# EAGLE board module_JDY08 (EAGLE 9.0.1)
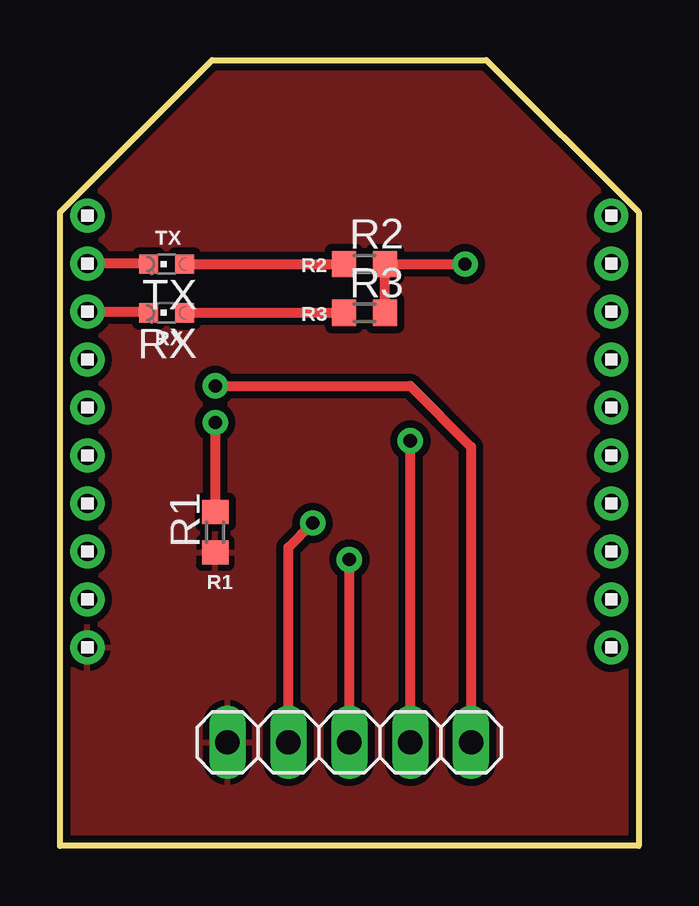
[diagram p0: board, top side]
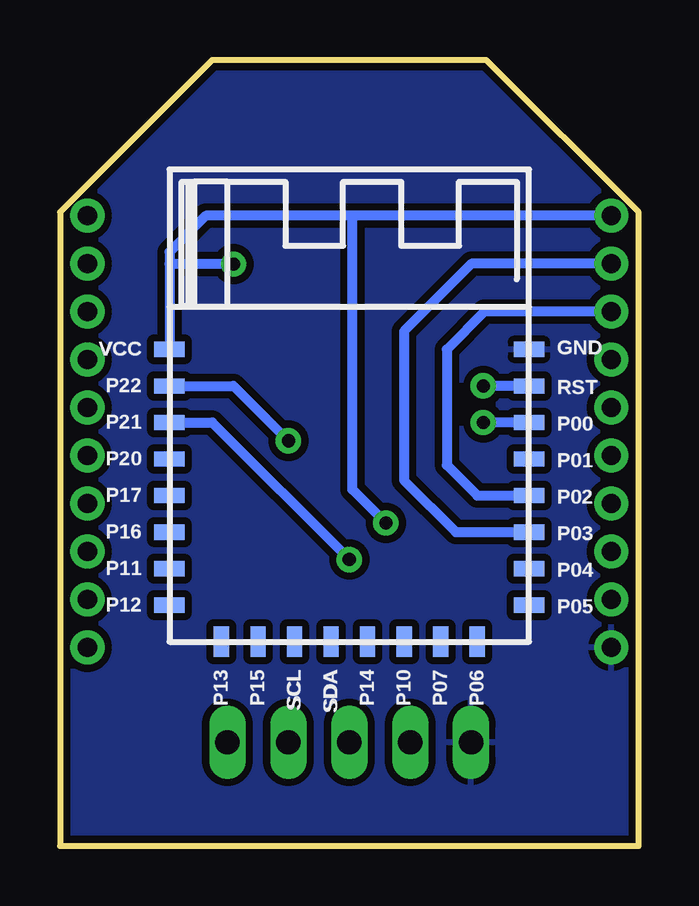
[diagram p1: board, bottom side, seen from below]

Size 24.13 x 32.77 mm. Coordinates in mm from the lower left corner, seen from the top.
Outline: 0,0 0,26.42 6.35,32.77 17.78,32.77 24.13,26.42 24.13,0 0,0
Copper layers (1*16): Top 0.035mm / dielectric 1.5mm / Bottom 0.035mm
Design rules "SparkFun-2-layer-STANDARD": minimum track width 10mil, minimum drill 20mil, track to track 10mil, track to pad 8mil, pad to pad 8mil, via to via 10mil, smd to smd 8mil, copper to edge 8mil, drill to drill 8mil, minimum pad ring 10mil, minimum via ring 10mil, stop-mask expansion 4mil, vias tented up to drill 25mil, thermal gap 10mil

## Footprints (pad centres in the part's own frame; a part is rotated, then mirrored left to right if it is on the bottom)
SMD0,65-1,27 = smd 0.635 x 1.27: 1 0,0
1X05 = drill 1.016 long: 1 -5.08,0; 2 -2.54,0; 3 0,0; 4 2.54,0; 5 5.08,0
1X10 = drill 0.8 pad 1.422: 1 -9,0; 2 -7,0; 3 -5,0; 4 -3,0; 5 -1,0; 6 1,0; 7 3,0; 8 5,0; 9 7,0; 10 9,0
R0603 = smd 1 x 1.1: 1 -0.85,0; 2 0.85,0
CHIPLED_0603 = smd 0.8 x 0.8: A 0,-0.75; C 0,0.75

## Placement (x,y rotation side)
GND  [SMD0,65-1,27]  4.57,20.7 90 bottom
JP1  [1X05]  12.06,4.32 0 top
LEFT1  1X10  [1X10]  1.14,17.27 270 top
P00  [SMD0,65-1,27]  4.57,17.65 90 bottom
P01  [SMD0,65-1,27]  4.57,16.13 90 bottom
P02  [SMD0,65-1,27]  4.57,14.6 90 bottom
P03  [SMD0,65-1,27]  4.57,13.08 90 bottom
P04  [SMD0,65-1,27]  4.57,11.56 90 bottom
P05  [SMD0,65-1,27]  4.57,10.03 90 bottom
P06  [SMD0,65-1,27]  6.73,8.51 0 bottom
P07  [SMD0,65-1,27]  8.25,8.51 0 bottom
P10  [SMD0,65-1,27]  9.78,8.51 0 bottom
P11  [SMD0,65-1,27]  19.56,11.56 270 bottom
P12  [SMD0,65-1,27]  19.56,10.03 270 bottom
P13  [SMD0,65-1,27]  17.4,8.51 0 bottom
P14  [SMD0,65-1,27]  11.3,8.51 180 bottom
P15  [SMD0,65-1,27]  15.87,8.51 180 bottom
P16  [SMD0,65-1,27]  19.56,13.08 90 bottom
P17  [SMD0,65-1,27]  19.56,14.6 90 bottom
P20  [SMD0,65-1,27]  19.56,16.13 270 bottom
P21  [SMD0,65-1,27]  19.56,17.65 90 bottom
P22  [SMD0,65-1,27]  19.56,19.18 90 bottom
R1  1K  [R0603]  6.48,13.08 90 top
R2  1K  [R0603]  12.7,24.26 0 top
R3  1K  [R0603]  12.7,22.23 0 top
RIGHT1  1X10  [1X10]  22.99,17.27 270 top
RST  [SMD0,65-1,27]  4.57,19.18 90 bottom
RX  [CHIPLED_0603]  4.45,22.23 90 top
SCL  [SMD0,65-1,27]  14.35,8.51 180 bottom
SDA  [SMD0,65-1,27]  12.83,8.51 180 bottom
TX  [CHIPLED_0603]  4.45,24.26 90 top
VCC  [SMD0,65-1,27]  19.56,20.7 270 bottom

## Library data of the parts
GND P00 P01-P07 P10-P17 P20-P22 RST SCL SDA VCC = wirepad
JP1 = pinhead
LEFT1 RIGHT1 = headers(2mm)
R1-R3 = rcl; SPICEPREFIX: R
RX TX = led

## Nets
GND: GND.1 JP1.1 LEFT1.10 R1.1
N$1: JP1.5 RST.1
N$2: JP1.3 P21.1
N$3: JP1.4 P22.1
N$4: P00.1 R1.2
N$5: LEFT1.3 P02.1 RX.C
N$6: LEFT1.2 P03.1 TX.C
N$7: R2.1 TX.A
N$8: R3.1 RX.A
VCC: JP1.2 LEFT1.1 R2.2 R3.2 VCC.1

## Tracks (layer width: path | path; a pad name or v marks a point on that pad's centre or on a via)
GND
  pour Top (isolate 0.305): -0.25,-0.25 24.38,-0.25 24.38,26.54 17.91,33.02 6.22,33.02 -0.25,26.54
  pour Bottom (isolate 0.305): -0.51,-0.51 24.64,-0.51 24.64,26.67 18.03,33.27 6.1,33.27 -0.51,26.67
N$1  (via drill 0.55)
  Top 0.406: JP1.5 17.14,16.64 14.6,19.18 v6.48,19.18
  Bottom 0.406: RST.1 v6.48,19.18
N$2  (via drill 0.55)
  Top 0.406: JP1.3 v12.06,11.94
  Bottom 0.406: P21.1 17.78,17.65 v12.06,11.94
N$3  (via drill 0.55)
  Top 0.406: JP1.4 v14.6,16.89
  Bottom 0.406: P22.1 16.89,19.18 v14.6,16.89
N$4  (via drill 0.55)
  Top 0.406: v6.48,17.65 R1.2
  Bottom 0.406: P00.1 v6.48,17.65
N$5
  Top 0.406: LEFT1.3 3.65,22.27 RX.C
  Bottom 0.406: LEFT1.3 6.43,22.27 8,20.7 8,15.87 6.73,14.6 P02.1
N$6
  Top 0.406: TX.C 3.68,24.27 LEFT1.2
  Bottom 0.406: LEFT1.2 6.97,24.27 9.78,21.46 9.78,15.24 7.62,13.08 P03.1
N$7
  Top 0.406: TX.A R2.1
N$8
  Top 0.406: RX.A R3.1
VCC  (via drill 0.55)
  Top 0.406: JP1.2 9.52,12.45 v10.54,13.46 | v16.89,24.26 R2.2 R3.2
  Bottom 0.406: LEFT1.1 11.94,26.27 | 11.94,26.27 18.05,26.27 19.56,24.77 19.56,24.26 | 19.56,24.26 VCC.1 | v10.54,13.46 11.94,14.86 11.94,26.27 | v16.89,24.26 19.56,24.26

## Text on the board
_tNames: TX | R2 | R3 | RX | R1
_bNames: GND | VCC | P22 | RST | P21 | P00 | P20 | P01 | P17 | P02 | P16 | P03 | P11 | P04 | P12 | P05 | P06 | P07 | P10 | P14 | SDA | SCL | P15 | P13
_tDocu: PWR: / LOG: | 3.3 V / 3.3 V | JDY-08 | GND | VCC | DAT | CLK | RST
_bDocu: GND | VCC | DAT | CLK | RST